# Altium PCB 220VAC_to_24Vdc.PcbDoc
Units mm, origin at the board's own origin, x right, y up, seen from the top; angles counter-clockwise.
Board outline 76.58 x 32.89 mm, 2 copper layers (Top Layer, Bottom Layer); 24 components, 12 nets, 48 pads, 0 vias.
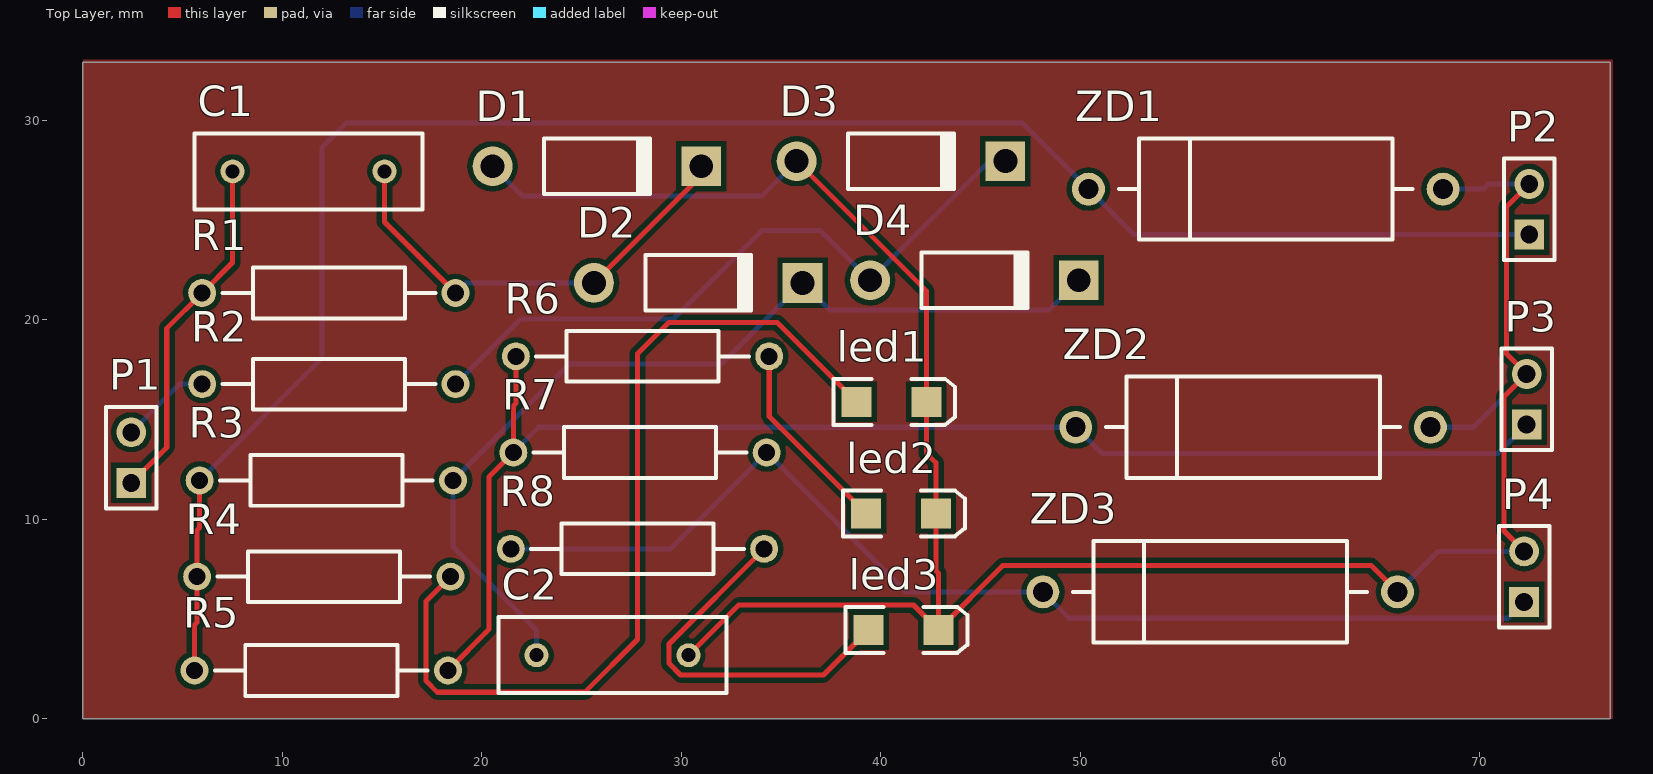
[diagram p0: Top Layer view]
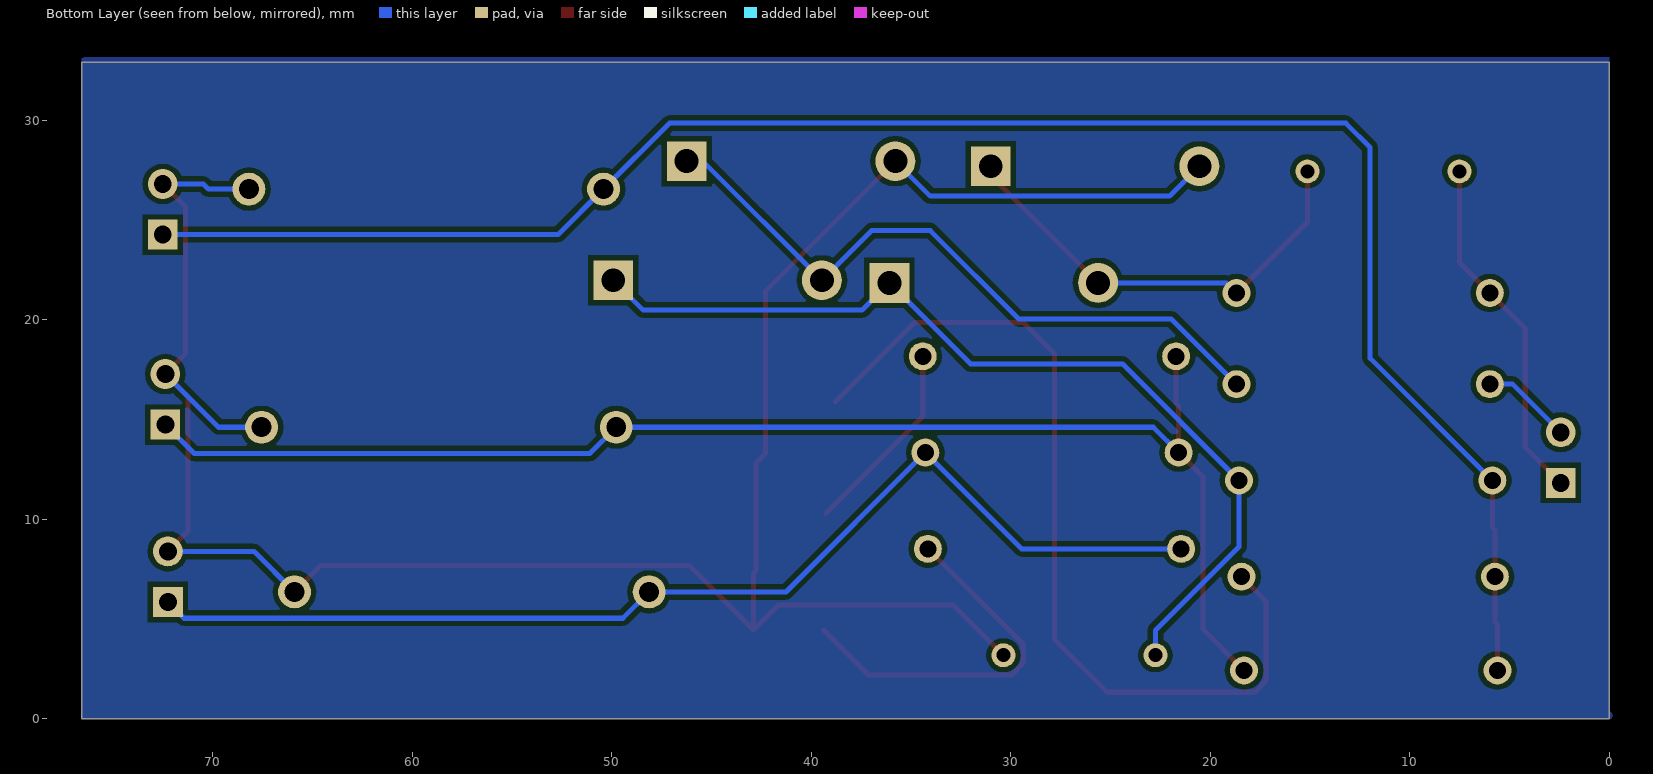
[diagram p1: Bottom Layer view, seen from below]

## Layer stack, top to bottom
Top Solder: solder mask 0.0102, Solder Resist, Dk 3.5
Top Layer: signal copper 0.0356
Dielectric 1: dielectric 0.32, FR-4, Dk 4.8
Bottom Layer: signal copper 0.0356
Bottom Solder: solder mask 0.0102, Solder Resist, Dk 3.5

## Board outline
0,0 76.581,0 76.581,32.893 0,32.893

## Design rules (kind name [scope] priority, off if disabled: settings)
Clearance [All] p1: gap=0.254 ignorepadtopadclearanceinfootprint=FALSE except(0: Arc-Hole Track-Hole SMDPad-Hole THPad-Hole Via-Hole Fill-Hole Poly-Hole Region-Hole Text-Hole)
PolygonConnect [All] p1: connectstyle=Relief reliefconductorwidth=0.254 reliefentries=4 polygonreliefangle="90 Angle" airgapwidth=0.254
RoomDefinition 220VAC_to_24Vdc [InComponentClass('220VAC_to_24Vdc')] p1: confinementstyle=ConfineIn formatcopy=TRUE lockcomponents=FALSE outline 0.785,0.889 75.438,0.889 75.438,32.131 0.785,32.131
RoutingVias [All] p1: holewidth=0.711 width=1.27 viastyle="Through Hole" minholewidth=0.711 minwidth=1.27 maxholewidth=0.711 maxwidth=1.27
SolderMaskExpansion [All] p1: expansion=0.102 istentingtop=FALSE
Width [All] p1: maxlimit=0.254 minlimit=0.254 preferedwidth=0.254
30 further rules are at their usual default settings.

## Components (designator, comment, footprint, x,y, rotation, side; value= is the part's Value field where it differs from the comment)
C1 "C1" RAD-0.3 11.326,27.432 r0 top
C2 "C2" RAD-0.3 26.566,3.175 r180 top value=1000uF
D1 "Diode 1N4007" DO-41 25.781,27.686 r0 top
D2 "Diode 1N4007" DO-41 30.861,21.844 r0 top
D3 "Diode 1N4007" DO-41 41.021,27.94 r0 top
D4 "Diode 1N4007" DO-41 44.704,21.971 r0 top
led1 "LED1" 3.2X1.6X1.1 40.541,15.875 r0 top
led2 "LED2" 3.2X1.6X1.1 41.021,10.287 r0 top
led3 "LED3" 3.2X1.6X1.1 41.148,4.445 r0 top
P1 "Header 2" HDR1X2 2.436,11.811 r90 top
P2 "24VDC" HDR1X2 72.517,24.257 r90 top
P3 "5VDC" HDR1X2 72.39,14.732 r90 top
P4 "3.3VDC" HDR1X2 72.263,5.842 r90 top
R1 "Res Semi" AXIAL-0.5 12.342,21.336 r0 top value=470k
R2 "R2" AXIAL-0.5 12.342,16.764 r0 top value=100
R3 "R3" AXIAL-0.5 12.215,11.938 r180 top value=100
R4 "R4" AXIAL-0.5 12.088,7.112 r180 top value=1K
R5 "R5" AXIAL-0.5 11.961,2.413 r0 top value=100
R6 "R6" AXIAL-0.5 28.067,18.161 r180 top value=1K
R7 "R3" AXIAL-0.5 27.94,13.335 r0 top value=100
R8 "R8" AXIAL-0.5 27.813,8.509 r180 top value=1K
ZD1 "24V" DIODE-0.7 59.309,26.543 r180 top
ZD2 "5V" DIODE-0.7 58.674,14.605 r180 top
ZD3 "3.3" DIODE-0.7 57.023,6.35 r180 top

## Footprints (in the part's own frame and the unit in brackets; to place one, negate y for a bottom-side part, rotate by r counter-clockwise, add the part's x,y. Pads: shape width x height; smd on the part's side, far side on the other; paste and mask are expansions set on the pad)
3.2X1.6X1.1 [mm] "SMT LED; 2 Flat Leads"
  rect 1.5x1.5 smd: 1(-1.75,0) 2(1.75,0)
  silkscreen extent -2.9,-1.15 3.2,1.15
AXIAL-0.5 [mm] "Axial Device, Thru-Hole; 2 Leads; 0.5 in Pin Spacing"
  round 1.4 hole 0.85: 1(-6.35,0) 2(6.35,0)
  silkscreen extent -5.33,-1.27 5.33,1.27
DIODE-0.7 [mm] "Diode, Thru-Hole; 2 Leads; 0.7 in Pin Spacing"
  round 1.65 hole 1: 1(-8.89,0) 2(8.89,0)
  silkscreen extent -7.37,-2.54 7.37,2.54
DO-41 [mm] "Diode, Axial; Body 5.2 x 2.7 mm (LxDia. max), Lead Dia. 0.86 mm (max)"
  round 2 hole 1.2: 1(-5.23,0)
  rect 2x2 hole 1.2: 2(5.23,0)
  silkscreen extent -2.65,-1.4 2.75,1.4
HDR1X2 [mm] "Connector; Header; 2 Position"
  rect 1.5x1.5 hole 0.9: 1(0,0)
  round 1.5 hole 0.9: 2(2.54,0)
  silkscreen extent -1.27,-1.27 3.81,1.27
RAD-0.3 [mm] "Radial Cap, Thru-Hole; 2 Leads; 0.3 in Pin Spacing"
  round 1.2 hole 0.7: 1(-3.81,0) 2(3.81,0)
  silkscreen extent -5.71,-1.91 5.72,1.91

## Part data
C1 C2: library part Cap, "Capacitor", LatestRevisionDate=17-Jul-2002, LatestRevisionNote="Re-released for DXP Platform.", PackageDescription="Radial Cap, Thru-Hole; 2 Leads; 0.3 in Pin Spacing", PackageReference=RAD-0.3, Published=8-Jun-2000, Publisher="Altium Limited"
  C1: C1=474kF
D1 D2 D3 D4: "1 Amp General Purpose Rectifier", Code_JEDEC=DO-204-AL, ComponentLink1Description="Manufacturer Link", ComponentLink1URL=http://www.fairchildsemi.com/, ComponentLink2Description=Datasheet, ComponentLink2URL=http://www.fairchildsemi.com/ds/1N%2F1N4001.pdf, DatasheetVersion=1998, LatestRevisionDate=17-Jul-2002, LatestRevisionNote="Re-released for DXP Platform.", PackageDescription="Diode, Axial; Body 5.2 x 2.7 mm (LxDia. max), Lead Dia. 0.86 mm (max)", PackageReference=DO-41, PackageVersion=Aug-1999, Published=8-Jun-2000, Publisher="Altium Limited"
led1 led3: library part LED2, "Typical RED, GREEN, YELLOW, AMBER GaAs LED", LatestRevisionDate=17-Jul-2002, LatestRevisionNote="Re-released for DXP Platform.", PackageDescription="SM LED; 2 Flat Leads", PackageReference=3.2X1.6X1.1, PackageVersion=Feb-2002, Published=8-Jun-2000, Publisher="Altium Limited"
led2: "Typical RED, GREEN, YELLOW, AMBER GaAs LED", LatestRevisionDate=17-Jul-2002, LatestRevisionNote="Re-released for DXP Platform.", PackageDescription="SM LED; 2 Flat Leads", PackageReference=3.2X1.6X1.1, PackageVersion=Feb-2002, Published=8-Jun-2000, Publisher="Altium Limited"
P1: "Header, 2-Pin", LatestRevisionDate=17-Jul-2002, LatestRevisionNote="Re-released for DXP Platform.", Publisher="Altium Limited"
P2 P3 P4: library part "Header 2", "Header, 2-Pin", LatestRevisionDate=17-Jul-2002, LatestRevisionNote="Re-released for DXP Platform.", Publisher="Altium Limited"
R1: "Semiconductor Resistor", LatestRevisionDate=17-Jul-2002, LatestRevisionNote="Re-released for DXP Platform.", PackageDescription="Axial Device, Thru-Hole; 2 Leads; 0.5 in Pin Spacing", PackageReference=AXIAL-0.5, Published=8-Jun-2000, Publisher="Altium Limited"
R2 R3 R4 R5 R6 R7 R8: library part "Res Semi", "Semiconductor Resistor", LatestRevisionDate=17-Jul-2002, LatestRevisionNote="Re-released for DXP Platform.", PackageDescription="Axial Device, Thru-Hole; 2 Leads; 0.5 in Pin Spacing", PackageReference=AXIAL-0.5, Published=8-Jun-2000, Publisher="Altium Limited"
ZD1 ZD2 ZD3: library part "D Zener", "Zener Diode", LatestRevisionDate=17-Jul-2002, LatestRevisionNote="Re-released for DXP Platform.", PackageDescription="Diode, Thru-Hole; 2 Leads; 0.7 in Pin Spacing", PackageReference=DIODE-0.7, Published=8-Jun-2000, Publisher="Altium Limited"

## Nets (pads, with @x,y where several pads share a name; then routed paths per layer and width w, separated by ;. In a path a pad name is that pad's centre, name@x,y a point inside that pad or via, vN(x,y) a via of type N, cw(c..) or ccw(c..) an arc to the next point about the centre after c; other vN are vias at no path point)
NetC1_1: C1.1 P1.1 R1.1 | length 17.7
  Top Layer w0.254: P1.1 4.216,13.591 4.216,19.56 R1.1 7.516,22.86 C1.1
NetC1_2: C1.2 D1.2 D2.1 R1.2 | length 22.8
  Top Layer w0.254: C1.2 15.136,24.892 R1.2 ; D2.1 31.011,27.224 D1.2
  Bottom Layer w0.254: R1.2 19.2,21.844 D2.1
NetC2_1: C2.1 D1.1 D3.1 led1.2 led2.2 led3.2 P2.2 P3.2 P4.2 ZD1.1 ZD2.1 ZD3.1 | length 119.8
  Top Layer w0.254: C2.1 32.891,5.69 41.653,5.69 led3.2 ; D3.1 42.291,21.44 led1.2 42.291,13.307 42.771,12.827 led2.2 42.771,7.417 42.898,7.29 led3.2 ; ZD3.1 64.592,7.671 46.124,7.671 led3.2 ; P4.2 71.247,9.398 71.247,16.129 P3.2 71.374,18.288 71.374,25.654 P2.2
  Bottom Layer w0.254: D1.1 22.05,26.187 34.038,26.187 D3.1 ; ZD3.1 67.945,8.382 P4.2 ; ZD2.1 69.723,14.605 P3.2 ; ZD1.1 70.231,26.543 70.485,26.797 P2.2
NetC2_2: C2.2 D2.2 D4.2 R3.1 | length 47.2
  Bottom Layer w0.254: C2.2 22.756,4.422 18.565,8.613 R3.1 24.407,17.78 32.027,17.78 D2.2 37.463,20.472 48.435,20.472 D4.2
NetD3_2: D3.2 D4.1 R2.2 | length 34.3
  Bottom Layer w0.254: R2.2 21.969,20.041 29.616,20.041 34.036,24.46 36.985,24.46 D4.1 45.443,27.94 D3.2
Netled1_1: led1.1 R4.1 | length 45.3
  Top Layer w0.254: R4.1 17.221,5.895 17.221,1.88 17.78,1.321 25.171,1.321 27.813,3.962 27.813,18.288 29.388,19.863 34.803,19.863 led1.1
Netled2_1: led2.1 R6.1 | length 9.9
  Top Layer w0.254: R6.1 34.417,15.141 led2.1
Netled3_1: led3.1 R8.1 | length 18.9
  Top Layer w0.254: R8.1 29.388,3.734 29.388,2.769 29.972,2.184 37.137,2.184 led3.1
NetP1_2: P1.2 R2.1 | length 4.6
  Bottom Layer w0.254: P1.2 4.849,16.764 R2.1
NetP2_1: P2.1 R3.2 R4.2 R5.1 ZD1.2 | length 92.2
  Top Layer w0.254: R5.1 5.611,4.699 5.738,4.826 R4.2 5.738,9.449 5.865,9.576 R3.2
  Bottom Layer w0.254: R3.2 11.989,18.062 11.989,28.626 13.208,29.845 47.117,29.845 ZD1.2 52.705,24.257 P2.1
NetP3_1: P3.1 R5.2 R6.2 R7.1 ZD2.2 | length 69.6
  Top Layer w0.254: R5.2 20.371,4.473 20.371,12.116 R7.1 21.59,15.672 21.717,15.799 R6.2
  Bottom Layer w0.254: R7.1 22.86,14.605 ZD2.2 51.105,13.284 70.942,13.284 P3.1
NetP4_1: P4.1 R7.2 R8.2 ZD3.2 | length 56.6
  Bottom Layer w0.254: R8.2 29.464,8.509 R7.2 41.275,6.35 ZD3.2 49.454,5.029 71.45,5.029 P4.1

## Polygon pours and split planes (outlines as drawn)
no net on Mechanical 1 "NONET_L01_P-001" (solid): 0,32.893 0,0 76.708,0 76.708,32.639 76.454,32.893
no net on Top Layer "NONET_L01_P001" (solid, pour order 1): -0.127,32.893 0,33.02 76.708,33.02 76.708,0 0,0 0,32.893 -0.254,33.147
no net on Bottom Layer "NONET_L02_P002" (solid, pour order 2): -0.127,0.254 0,0.381 0,33.147 76.454,33.147 76.581,33.274 76.581,0 -0.127,0 -0.254,-0.127